# Altium PCB PoBoI.PcbDoc (part 3 of 4)
Units mm, origin at the board's own origin, x right, y up, seen from the top; angles counter-clockwise.
Board outline 90.25 x 95.8 mm, 4 copper layers (Top Layer, GND Layer, PWR Layer, Bottom Layer), stack 1.537 mm thick; 250 components, 177 nets, 942 pads, 25 vias.
Unrouted connection lines stored in the file: 192.
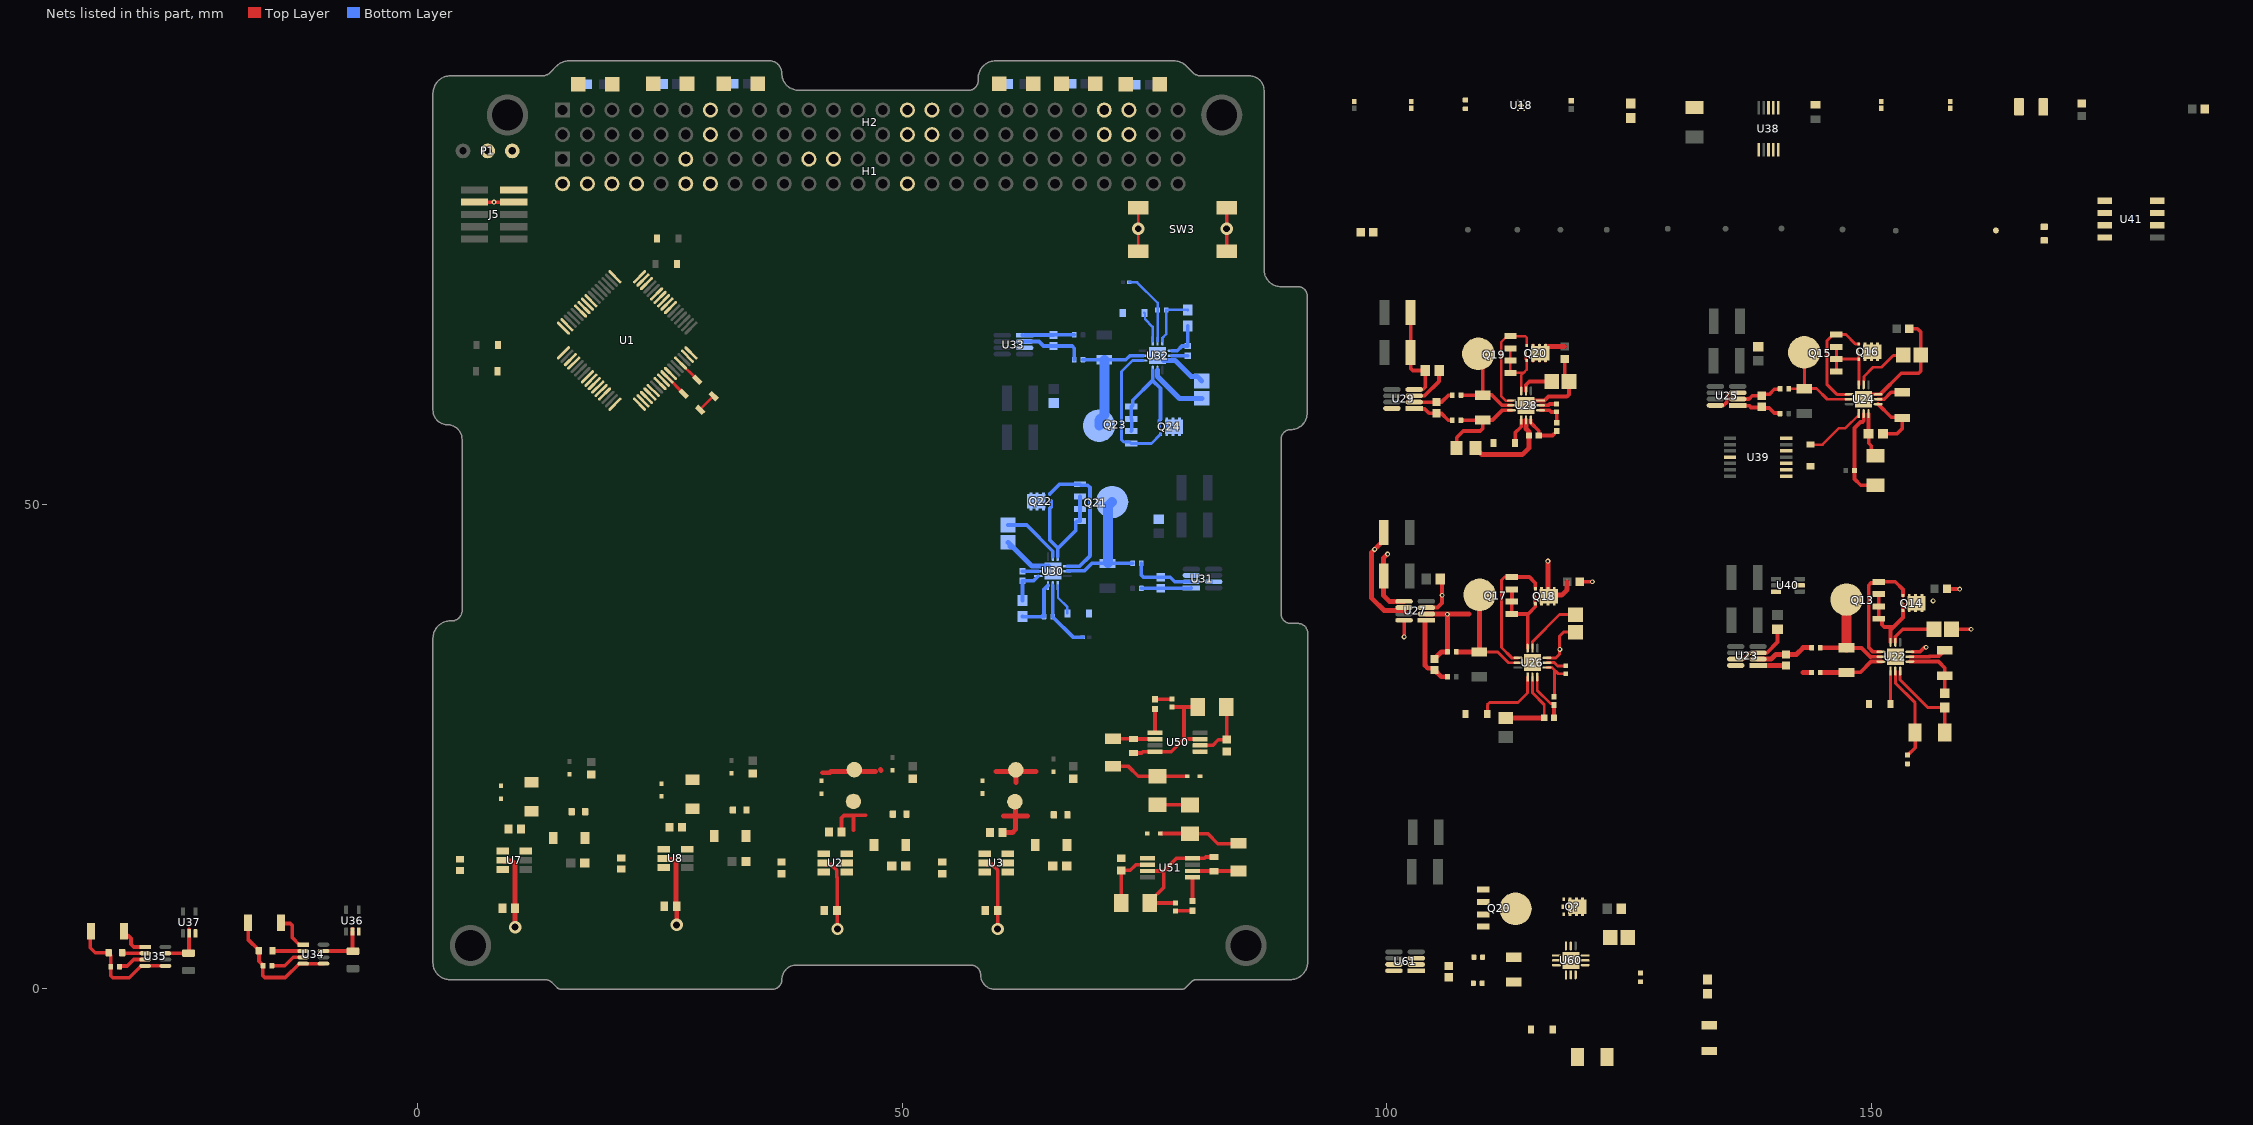
[diagram p4: the nets of this part, all layers, seen from the top]

## Part data (continued)
R81 R91 R152: library part CMP-009-00195-1, "Fixed Resistor, Metal Glaze/thick Film, 0.25W, 7500ohm, 200V, 1% +/-Tol, 100ppm/Cel, Surface Mount, 1206", Case/Package=1206, Max Operating Temperature=155°C, Min Operating Temperature=-55°C, Power=250mW, Tolerance=1%, Mounting Technology="Surface Mount", Pins=2, RoHS Compliant=Yes
R82 R92 R153: library part CMP-009-00194-1, "Fixed Resistor, Thin Film, 0.15W, 80000ohm, 75V, 0.1% +/-Tol, 25ppm/Cel, Surface Mount, 0603", Case/Package=0603, Max Operating Temperature=150°C, Min Operating Temperature=-55°C, Power=150mW, Tolerance=0.1%, Mounting Technology="Surface Mount", Pins=2, RoHS Compliant=Yes
R83 R93 R154: library part CMP-009-00193-1, "Fixed Resistor, Thin Film, 0.25W, 150000ohm, 200V, 1% +/-Tol, 50ppm/Cel, Surface Mount, 1206", Case/Package=1206, Max Operating Temperature=155°C, Min Operating Temperature=-55°C, Power=250mW, Tolerance=1%, Mounting Technology="Surface Mount", Pins=2, RoHS Compliant=Yes
R84 R94 R103 R112 R121 R130 R150: library part CMP-26527-000133-1, "General Purpose Thick Film Chip Resistor, 1206, 25mΩ, 1%, 0.5W", Case Code (Imperial)=1206, Case Code (Metric)=3216, Max Operating Temperature=155°C, Max Power Dissipation=500mW, Min Operating Temperature=-55°C, Resistance=25m, Resistor Type="Thick Film", Temperature Coefficient=100ppm/°C, Tolerance=1%, Case/Package=1206, Construction=Rectangular, Contact Plating=Tin, Depth=1.55mm, Height=0.026inch, Lead Free="Lead Free", Length=0.12inch, Military Standard=Not, Mount="Surface Mount", Number of Terminations=2, Packaging="Tape and Reel", Power Rating=500mW, Radiation Hardening=No, RoHS Compliant=Yes, Series=CSR, Size Code=1206, Width=0.061inch
R85: library part CMP-009-00069-2, "120R 0.1W 5% 0603 (1608 Metric)  SMD", Case/Package=0603, Power=100mW, Tolerance=5%, Mounting Technology=SMT, Pins=2
R86 R87 R95 R96 R104 R105 R113 R114 R122 R123 R131 R132 R155 R156: library part CMP-009-00152-3, "Chip Resistor, 10 Ohms, +/-1 %, 63 mW, -55 to 155 degC, 0402", Case/Package=0402, Max Operating Temperature=155°C, Min Operating Temperature=-55°C, Power=63mW, Tolerance=1%, Pins=2
R88 R89 R97 R98 R106 R107 R115 R116 R124 R125 R133 R134 R157 R158: library part CMP-009-00192-1, "Fixed Resistor, Metal Glaze/thick Film, 0.5W, 3300ohm, 200V, 5% +/-Tol, 200ppm/Cel, Surface Mount, 1210", Case/Package=1210, Max Operating Temperature=155°C, Min Operating Temperature=-55°C, Power=500mW, Tolerance=5%, Mounting Technology="Surface Mount", Pins=2, RoHS Compliant=Yes
R99 R108: library part CMP-009-00197-1, "Fixed Resistor, Metal Glaze/thick Film, 0.125W, 732000ohm, 150V, 1% +/-Tol, 100ppm/Cel, Surface Mount, 0805", Case/Package=0805, Max Operating Temperature=155°C, Min Operating Temperature=-55°C, Power=125mW, Tolerance=1%, Mounting Technology="Surface Mount", Pins=2, RoHS Compliant=Yes
R100 R109: library part CMP-009-00015-5, "Chip Resistor, 10 KOhm, +/- 1%, 0.1 W, -55 to 155 degC, 0402 (1005 Metric)", Case/Package=0402, Max Operating Temperature=155°C, Min Operating Temperature=-55°C, Power=100mW, Tolerance=1%, Voltage Rating=50V, Mounting Technology=SM, Pins=2, RoHS Compliant=True
R101 R110: library part CMP-009-00202-1, "Fixed Resistor, Metal Glaze/thick Film, 0.0625W, 60400ohm, 50V, 1% +/-Tol, 100ppm/Cel, Surface Mount, 0402", Case/Package=0402, Max Operating Temperature=155°C, Min Operating Temperature=-55°C, Power=62.5mW, Tolerance=1%, Mounting Technology="Surface Mount", Pins=2, RoHS Compliant=Yes
R102 R111: library part CMP-009-00204-1, "Fixed Resistor, Metal Glaze/thick Film, 0.2W, 220000ohm, 50V, 5% +/-Tol, 200ppm/Cel, Surface Mount, 0402", Case/Package=0402, Max Operating Temperature=155°C, Min Operating Temperature=-55°C, Power=200mW, Tolerance=5%, Mounting Technology="Surface Mount", Pins=2, RoHS Compliant=Yes
R117 R126: library part CMP-009-00205-1, "Fixed Resistor, Metal Glaze/thick Film, 0.05W, 866000ohm, 25V, 1% +/-Tol, -200,200ppm/Cel, 0201", Case/Package=0201, Max Operating Temperature=125°C, Min Operating Temperature=-55°C, Power=50mW, Tolerance=1%, Pins=2, RoHS Compliant=Yes
R118 R127: library part CMP-009-00089-2, "2K37 0.063W 1% 0402 (1005 Metric)  SMD", Case/Package=0402, Power=63mW, Tolerance=1%, Mounting Technology=SMT, Pins=2
R119 R128: library part CMP-009-00206-1, "Fixed Resistor, Metal Glaze/thick Film, 0.1W, 37400ohm, 75V, 1% +/-Tol, 100ppm/Cel, Surface Mount, 0603", Case/Package=0603, Max Operating Temperature=155°C, Min Operating Temperature=-55°C, Power=100mW, Tolerance=1%, Mounting Technology="Surface Mount", Pins=2, RoHS Compliant=Yes
R120 R129: library part CMP-009-00022-5, "Chip Resistor, 100 KOhm, +/- 1%, 0.1 W, -55 to 155 degC, 0402 (1005 Metric)", Case/Package=0402, Max Operating Temperature=155°C, Min Operating Temperature=-55°C, Power=100mW, Tolerance=1%, Voltage Rating=50V, Mounting Technology=SM, Pins=2, RoHS Compliant=True
R135 R136: library part CMP-009-00076-2, "1K 0.125W 5% 0805 (2012 Metric)  SMD", Case/Package=0805, Power=125mW, Tolerance=5%, Mounting Technology=SMT, Pins=2
R137: library part CMP-009-00025-5, "Chip Resistor, 100 KOhm, +/- 1%, 0.25 W, -55 to 155 degC, 1206 (3216 Metric)", Case/Package=1206, Max Operating Temperature=155°C, Min Operating Temperature=-55°C, Power=250mW, Tolerance=1%, Voltage Rating=200V, Mounting Technology=SM, Pins=2, RoHS Compliant=True
R138: library part CMP-009-00017-5, "Chip Resistor, 10 KOhm, +/- 1%, 01 W, -55 to 155 degC, 0603 (1608 Metric)", Case/Package=0603, Max Operating Temperature=155°C, Min Operating Temperature=-55°C, Power=100mW, Tolerance=1%, Voltage Rating=50V, Mounting Technology=SM, Pins=2, RoHS Compliant=True
Rc Rc1: library part CMP-2002-08403-1, Manufacturer="Vishay Dale", Part Number=CRCW040224K0FKED
RFB1 RFB11: library part CMP-2003-00461-1, Manufacturer=Panasonic, Part Number=ERJ-8ENF64R9V
RFB2 RFB21: library part CMP-2000-00636-2, "RES SMD 7.5K OHM 1% 1/10W 0603", Case Code (Imperial)=0603, Case Code (Metric)=1608, Max Operating Temperature=155°C, Max Power Dissipation=100mW, Min Operating Temperature=-55°C, Package Quantity=1, Resistance=7.5kR, Resistance Tolerance=1%, Resistor Type="Thick Film", Temperature Coefficient=100ppm/°C, Voltage Rating=75V, Voltage Rating (DC)=50V, Case/Package=0603, Construction=Rectangular, Contact Plating=Tin, Depth=0.8mm, Features="Automotive AEC-Q200", Height=0.022inch, Lead Free="Lead Free", Length=1.6mm, Military Standard=Not, Mount="Surface Mount", Number of Terminations=2, Packaging="Tape and Reel", Power Rating=100mW, Radiation Hardening=No, REACH SVHC="No SVHC", RoHS Compliant=Yes, Series=ERJ, Termination=SMD/SMT, Tolerance=1%, Width=0.8mm
RLED1 RLED2: library part CMP-1659-00057-1, "Chip Resistor, 150 Ohm, +/- 1%, 0.1 W, -55 to 155 degC, 0603 (1608 Metric), RoHS, Tape and Reel / RC0603FR-07150RL", Case\Package=Radial, Colour=Green, Forward Voltage="2.2 V", Package Quantity=1000, ComponentLink1Description="Manufacturer URL", ComponentLink1URL=http://www.yageo.com/, ComponentLink2Description=Datasheet, ComponentLink2URL=http://www.yageo.com/documents/recent/PYu-RC_Group_51_RoHS_L_04.pdf, DatasheetVersion="Rev. 4, 02/2016", Height="8.6 mm", Illumination Colour=Green, Lens Style=Clear, Luminous Intensity="200 mcd", Mount="Through Hole", Nominal Vf="2.2 V", PackageDescription="2-Pin Surface Mount Device, Body 1.6 x 0.8 mm", PackageReference=0603, Packaging=Bulk, RoHSCompliant=true, Viewing Angle="20 degrees"
RLED3 RLED4: library part CMP-2000-00001-1, "240 Ohm 0603 / ERA3AEB244V", Manufacturer=Panasonic, Part Number=ERA3AEB244V
RLED5 RLED6: library part CMP-1012-00468-3, "RES Thick Film, 430Ω, 1%, 0.1W, 100ppm/°C, 0603 / CRCW0603430RFKEA", Case Code (Imperial)=0603, Case Code (Metric)=1608, Max Operating Temperature=155°C, Max Power Dissipation=100mW, Min Operating Temperature=-55°C, Package Quantity=10, Resistance=430R, Temperature Coefficient=100ppm/°C, Tolerance=1%, Voltage Rating=75V, Case/Package=0603, Composition="Thick Film", Contact Plating=Tin, Depth=0.85mm, Features="Automotive AEC-Q200", Height=0.45mm, Lead Free="Lead Free", Length=1.55mm, Military Standard=Not, Mount="Surface Mount", Number of Pins=2, Number of Terminations=2, Packaging="Tape and Reel", Power Rating=100mW, Radiation Hardening=No, Termination=SMD/SMT, Voltage Rating (DC)=75V, Weight=7.1E-05oz, Width=0.033inch, Working Voltage=75V
SW1 SW2: library part CMP-011-00000-2, "Tactile Switch, SPST-NO, 0.05 A, 12 V, -25 to 70 degC, 2-Pin SMD, RoHS, Tape and Reel", Case/Package=B3U-1000, Contact Current Rating=50mA, IP Rating=IP40, Manufacturer="Omron Electronic Components", Max Contact Resistance=100mohm, Max Operating Temperature=70°C, Max Voltage Rating (DC)=12V, Min Operating Temperature=-25°C, Operating Force=153gf, Package Description="2-Pin Surface Mount Device, Body 3 x 2.5 mm", Package Quantity=3500, Resistance=0.1Ohm, Contact Material=Silver, Current Rating=50mA, Datasheet URL=http://www.omron.com/ecb/products/pdf/en-b3u.pdf, Datasheet Version=Jan-15, Manufacturer URL=http://www.omron.com/, Max Current Rating=50mA, Mounting Technology=SM, Package Reference=B3U-1000, Packaging=TapeandReel, RoHS Compliant=True, Throw Configuration=SPST, Voltage Rating=12V, Voltage Rating (DC)=12V
SW3: library part CMP-011-00014-3, "Momentary Switch", Rated Current Max="0.01 mA", Rated Current Min="50 mA", Rated Voltage Max="1 V", Rated Voltage Min="12 V", DataSheet=https://www.cuidevices.com/product/resource/ts04.pdf
U1: library part CMP-0237-00201-3, "ARM Cortex-M3 32-bit MCU, 512 KB Flash, 64 KB Internal RAM, 51 I/Os, 64-pin LQFP, -40 to 85 degC, Tray", I/Os (High Current)=51, Operating Frequency(F) (Processor speed) (MHz)=72, Supply Voltage(Vcc) min (V)=2, A/D Converter="3x12-bit (16 Channel)", ComponentLink1Description="Manufacturer URL", ComponentLink1URL=http://www.st.com/web/en/home.html, ComponentLink2Description=Datasheet, ComponentLink2URL=http://www.st.com/st-web-ui/static/active/en/resource/technical/document/datasheet/CD00191185.pdf, ComponentLink3Description="Package Specification", ComponentLink3URL=http://www.st.com/st-web-ui/static/active/en/resource/technical/document/datasheet/DM00037051.pdf, Core="ARM Cortex-M3", D/A Converter="2x12-bit (2 Channel)", DatasheetVersion="Rev. 8", FLASH Size (Prog) (kB)=512, Internal RAM Size (kB)=64, Mounting Technology="Surface Mount", PackageDescription="64-Pin Low Profile Quad Flat Package, 10 x 10 mm Body, 0.5 mm Pitch", PackageReference=LQFP64, PackageVersion="Rev. 4, 06/2013", Packing=Tray, PartNumber=STM32F103RET6
U2 U3 U7 U8: library part CMP-0491-01627-1, "600 mA, 1.4 MHz Step-Down Switching Regulator, 6-pin SOT23 (S6-6), -40 to 85 degC, Pb-Free, Mini Tape and Reel", Manufacturer="Linear Technology", ComponentLink1Description="Manufacturer URL", ComponentLink1URL=http://www.linear.com/, ComponentLink2Description=Datasheet, ComponentLink2URL=http://cds.linear.com/docs/en/datasheet/lt1616fs.pdf, ComponentLink3Description="Package Specification", ComponentLink3URL=http://cds.linear.com/docs/en/datasheet/175435f.pdf, Mounting Technology="Surface Mount", Number of Outputs=1, PackageDescription="6-Pin Plastic SOT-23, Body 1.625 x 2.9 mm, Pitch 0.95 mm", PackageReference=S6-6, PackageVersion=Aug-07, Packing="Mini Tape and Reel", PartNumber=LT1616ES6#TRMPBF, RoHS=TRUE
U18: library part CMP-019-00040-3, "Ultra-Low-Noise, Low-IQ LDO, 3.3 V, 0.25 A, -40 to 125 degC, 4-Pin X2SON, RoHS, Tape and Reel", Max Operating Temperature=125°C, Min Operating Temperature=-40°C, Output Voltage=3.3V, Pins=5
U22 U24 U26 U28 U30 U32 U60: library part CMP-019-00049-1, "Switching Controller, CMOS, PQCC12", Case/Package=HVQCCN, Max Operating Temperature=85°C, Max Supply Voltage=36V, Min Operating Temperature=-40°C, Pins=12, RoHS Compliant=Yes
U23 U25 U27 U29 U31 U33 U61: library part CMP-010-00025-1, "Power Supply Support Circuit, Fixed, 2 Channel, 2V, PDSO8", Case/Package=LSSOP, Max Operating Temperature=125°C, Max Supply Voltage=5.5V, Min Operating Temperature=-40°C, Min Supply Voltage=3V, Nominal Supply Voltage=3.3V, Pins=8, RoHS Compliant=Yes
U34 U35: library part CMP-00023-00003-1, "Power Supply Management Circuit, Adjustable, 1 Channel, BICMOS, PDSO8", Case/Package=LSSOP, Max Operating Temperature=125°C, Min Operating Temperature=-40°C, Pins=8, RoHS Compliant=Yes
U36 U37: library part CMP-016-00011-1, "AND Gate, AUP/ULP/V Series, 1-Func, 2-Input, CMOS, PDSO5", Case/Package=TSSOP, Max Operating Temperature=125°C, Max Supply Voltage=3.6V, Min Operating Temperature=-40°C, Min Supply Voltage=800mV, Nominal Supply Voltage=3.3V, Logic Type="AND GATE", Pins=5, RoHS Compliant=Yes
U38: library part CMP-015-00009-7, "Interface Circuit, PDSO10", Case/Package=TSSOP, Max Operating Temperature=70°C, Max Supply Voltage=5.5V, Min Operating Temperature=0°C, Min Supply Voltage=2.7V, Nominal Supply Voltage=3.3V, Pins=10, RoHS Compliant=Yes
U39: library part CMP-016-00013-1, "Inverter, AC Series, 6-Func, 1-Input, CMOS, PDSO14", Case/Package=TSSOP, Max Operating Temperature=85°C, Max Supply Voltage=6V, Min Operating Temperature=-40°C, Min Supply Voltage=2V, Nominal Supply Voltage=3.3V, Logic Type=INVERTER, Pins=14, RoHS Compliant=Yes
U40: library part CMP-019-00050-1, "Bus Driver, LVC/LCX/Z Series, 1-Func, 1-Bit, True Output, CMOS, PDSO6", Case/Package=TSSOP, Max Operating Temperature=125°C, Max Supply Voltage=5.5V, Min Operating Temperature=-40°C, Min Supply Voltage=1.65V, Pins=6, RoHS Compliant=Yes
U41: library part CMP-015-00010-2, "Line Transceiver, 1 Func, 1 Driver, 1 Rcvr, BICMOS, PDSO10", Case/Package=HVSON, Max Operating Temperature=85°C, Max Supply Voltage=5.25V, Min Operating Temperature=-40°C, Min Supply Voltage=4.75V, Nominal Supply Voltage=5V, Pins=10, RoHS Compliant=Yes
U50 U51: library part CMP-0069-01733-3, "600kHz/1.3MHz Step-up PWM DC/DC Converter, 8-pin MSOP, Pb-Free", Manufacturer="Texas Instruments", PackageTopMarking=ZXTT*S18B, PowerWise=N, Code_JEDEC=MO-187-AA, ComponentLink1Description="Datasheet URL", ComponentLink1URL=http://www.ti.com/general/docs/lit/getliterature.tsp?genericPartNumber=LM2622&fileType=pdf, CompType=Switcher, PackageDescription="MINI SOIC, .118 x .118 x .034in, 8 Lead, .0256in Pitch", PackageReference=DGK0008A, PinCount=8, RoHS=Y
Y1: library part CMP-003-00029-1, "Crystal 32.768kHz 10ppm 7pF -40C +85C", Frequency=32.768kHz, Pins=2

## Free pads (board coordinates)
  round 4.25 hole 3.18: 3(5.477,4.47) 3(9.28,90.17) 3(82.982,90.17) 3(85.481,4.47)

## Via types
v1: diameter 0.508, hole 0.254, Top Layer to Bottom Layer, 16 vias
v2: diameter 1.27, hole 0.711, Top Layer to Bottom Layer, 6 vias
v3: diameter 0.4, hole 0.18, Top Layer to Bottom Layer, 3 vias

## Nets (pads, with @x,y where several pads share a name; then routed paths per layer and width w, separated by ;. In a path a pad name is that pad's centre, name@x,y a point inside that pad or via, vN(x,y) a via of type N, cw(c..) or ccw(c..) an arc to the next point about the centre after c; other vN are vias at no path point)
3V3: C88.1 R108.1 R112.1 R113.1 R115.1 R116.1 U28.12 U29.4 | length 21
  Top Layer w0.381: R116.1@102.473,69.799 R115.1@102.473,65.659 102.473,64.028 102.696,63.805 C88.1@103.974,63.805 103.974,62.088 103.751,61.865 102.866,61.865 U29.4@102.845,61.843 ; R108.1@107.202,55.804 107.242,55.844 107.242,56.883 107.915,57.556 109.652,57.556 109.931,57.836 R112.1@109.931,58.693 110.915,58.693 111.912,59.691 U28.12@112.894,59.691 ; R113.1@107.663,58.674 107.673,58.684 R112.1@109.922,58.684
3V3_1: C24.2 D5.2 D54.2 L3.2 R28.2
3V3_2: C29.2 D7.2 D55.2 L4.2 R34.2
3V3_EnableP: D58.1 U26.1 | length 7.3
  Top Layer w0.3: D58.1@110.386,28.372 110.386,29.314 110.612,29.54 113.563,29.54 114.545,30.521 U26.1@114.545,32.173
3V3_EnablePWD: U39.2
3V3_EnableS: D59.1 U28.1 | length 2.6
  Top Layer w0.381: D59.1@113.256,56.337 113.256,57.376 113.884,58.004 U28.1@113.884,58.715
3V3_LDO: C76.1 U1.1 U1.13 U1.19 U1.32 U1.48 U1.64 U18.1
3V3_Primary: Q18.1 Q18.2 Q18.3 Q18.6 Q18.7 Q18.8 Q18.10 | length 5.8
  Top Layer w0.508: Q18.2@116.637,41.38 v1(116.637,44.145) ; Q18.10@116.731,40.53 116.823,40.621 118.066,40.621 118.628,41.184 118.628,42.012
3V3_Secondary: Q20.1@116.409,66.458 Q20.2@115.759,66.458 Q20.3@115.109,66.458 Q20.6 Q20.7 Q20.8 Q20.10 | length 8.2
  Top Layer w0.305: Q20.6@115.109,64.758 115.109,65.011 Q20.10@115.707,65.608 ; Q20.3@115.109,66.458 115.109,66.206 Q20.10@115.707,65.608 ; Q20.7@115.759,64.758 115.759,65.518 Q20.10@115.849,65.608 ; Q20.2@115.759,66.458 115.759,65.698 Q20.10@115.849,65.608 ; Q20.8@116.409,64.758 116.409,65.048 Q20.10@115.849,65.608 ; Q20.1@116.409,66.366 Q20.1@116.409,66.458 ; Q20.10@115.707,65.608 Q20.10@115.849,65.608
  Top Layer w0.5: Q20.10@115.849,65.608 Q20.10@116.508,66.267 ; Q20.1@116.409,66.366 Q20.10@116.508,66.267 ; 118.363,66.285 118.345,66.267 Q20.10@116.508,66.267
3V3_stmDisableP: U1.16 U39.1
3V3_stmDisableS: U1.17 U39.3
5V: R80.1 R84.1 R86.1 U22.12 | length 6.8
  Top Layer w0.4: R84.1@147.447,32.658 148.881,32.671 149.97,33.78 150.994,33.79 U22.12@151.045,33.79
  Top Layer w0.5: R86.1@144.753,32.658 R84.1@147.447,32.658
5V_1: C8.2 D1.2 D52.2 L1.2 R9.2 | length 5.8
  Top Layer w0.508: 41.808,22.301 42.545,22.301 42.672,22.428 44.888,22.428 L1.2@45.081,22.621 45.274,22.428 47.286,22.428 ; 47.763,22.621 47.828,22.556
5V_2: C12.2 D3.2 D53.2 L2.2 R12.2 | length 5.5
  Top Layer w0.508: 59.665,22.428 63.83,22.428 ; 61.743,21.315 L2.2@61.743,22.596 L2.2@61.747,22.592
5V_EnableP: D56.1 U22.1 | length 3.4
  Top Layer w0.3: D56.1@151.991,29.413 U22.1@151.991,32.782
5V_EnablePWD: D63.1 D64.1 | length 2
  Top Layer w0.3: D63.1@29.159,59.741 29.159,59.773 D64.1@30.556,61.17
5V_EnableS: D57.1 U24.1 | length 6.4
  Top Layer w0.254: D57.1@143.739,56.157 144.981,56.157 146.685,57.861 147.345,57.861 148.717,59.233 U24.1@148.717,59.351
5V_Primary: Q14.1 Q14.2 Q14.3 Q14.6 Q14.7 Q14.8 Q14.10
  other v1: 156.388,40.03
5V_Secondary: Q16.1 Q16.2 Q16.3 Q16.6 Q16.7 Q16.8 Q16.10
5V_stmDisableS: U1.21 U39.5
5V_stmEnableP1: D63.2 U1.25 | length 2.5
  Top Layer w0.3: U1.25@25.742,63.156 27.481,61.417 D63.2@27.483,61.417
5V_stmEnableP2: D64.2 U1.29 | length 2.5
  Top Layer w0.3: U1.29@27.156,64.57 D64.2@28.88,62.846 D64.2@28.88,62.814
12V: R150.1 R151.1 R155.1 U60.12
12V_EnableP: D?.1 U60.1
12V_Primary: Q?.1 Q?.2 Q?.3 Q?.6 Q?.7 Q?.8 Q?.10
B.5: H1.30
B.5_VD: R40.2 R41.1 U1.26
BOOST2_1: C5.1 D1.1 U2.1
BOOST2_2: C10.1 D3.1 U3.1
BOOST_1: C21.1 D5.1 U7.1
BOOST_2: C26.1 D7.1 U8.1
Boot0: H1.8 P1.2
BWE0: H1.14
C\E\m\p\p\t\: U1.24
FB2_1: R9.1 R11.2 U2.3
FB2_2: R12.1 R26.2 U3.3
FB_1: R28.1 R29.2 U7.3
FB_2: R34.1 R44.2 U8.3
GND: C1.2 C2.2 C3.2 C4.2 C6.2 C7.2 C8.1 C11.2 C12.1 C19.2 C23.2 C24.1 C25.2 C27.2 C28.2 C29.1 C75.2 C76.2 C77.2 C79.2 C80.2 C82.2 C83.2 C85.2 C86.2 C88.2 C89.2 C91.2 C92.2 C94.2 C95.1 C96.2 C97.1 C98.2 C99.2 C100.2 C101.2 C102.2 C103.2 C104.2 C121.2 C122.2 Cc1.2 Cc.2 Cin1.2 Cin.2 Cout1.2 Cout.2 D2.2 D4.2 D6.2 D8.2 D38.2 D41.2 D47.2 D50.2 D56.2 D57.2 D58.2 D59.2 D60.2 D61.2 D?.2 GND.1 H2.13 H2.14 H2.29 H2.30 H2.31 H2.32 H2.47 H2.48 J5.3 J5.4 LED1.1 LED2.1 LED3.1 LED4.1 LED5.1 LED6.1 P1.1 R11.1 R26.1 R29.1 R41.2 R44.1 RFB2.2 RFB21.2 SW1.1 SW2.1 SW3.1 SW3.2 U1.12 U1.18 U1.31 U1.47 U1.63 U2.2 U3.2 U7.2 U8.2 U18.2 U18.5 U22.6 U22.13 U23.3 U23.7 U23.8 U24.6 U24.13 U25.3 U25.8 U26.6 U26.13 U27.3 U27.8 U28.6 U28.13 U29.3 U29.8 U30.6 U30.13 U31.3 U31.7 U32.6 U32.13 U33.3 U34.4 U34.5 U35.4 U35.5 U36.3 U37.3 U38.4 U38.5 U39.7 U40.2 U40.6 U41.6 U50.4 U50.7 U51.4 U51.7 U60.6 U60.13 U61.3 U61.7 U61.8 | length 159.4
  Top Layer w0.3: U26.6@116.535,34.163 117.475,34.163 117.856,34.544 117.856,36.398 118.276,36.818 C83.2@119.482,36.818
  Top Layer w0.381: SW2.1@-33.655,6.354 -33.702,6.401 -33.757,6.346 -33.757,4.242 -33.249,3.734 C98.2@-31.866,3.734 ; C98.2@-31.866,3.684 -31.641,3.459 C97.1@-31.641,2.286 -31.641,1.366 -31.418,1.143 -29.731,1.143 -28.497,2.378 U35.4@-28.101,2.378 U35.5@-26.001,2.378 ; SW1.1@-17.473,6.807 -17.473,5.1 -16.361,3.987 C96.2@-16.361,3.937 -16.358,3.934 -16.358,2.852 -15.919,2.413 -15.951,2.38 -15.951,1.392 -15.728,1.168 -13.628,1.168 -12.19,2.606 U34.4@-11.795,2.606 U34.5@-9.694,2.606 ; J5.3@5.864,81.175 J5.4@9.934,81.175 ; U2.2@41.904,13.005 42.063,12.845 42.67,12.845 43.26,12.255 43.26,11.542 43.301,11.501 43.301,8.097 R11.1@43.282,8.077 43.307,8.052 43.307,6.198 v2(43.332,6.172) ; U3.2@58.515,13.005 58.675,12.845 59.282,12.845 59.872,12.255 59.872,8.088 R26.1@59.883,8.077 59.875,8.07 59.875,6.18 v2(59.868,6.172) ; RFB2.2@73.889,24.345 74.738,24.345 74.869,24.476 U50.4@76.11,24.476 77.77,24.476 79.07,25.776 U50.7@80.76,25.776 ; U51.7@75.323,12.172 77.018,12.172 ; Cout.2@76.352,18.996 79.712,18.996 Cout1.2@79.731,18.977 ; Cc.2@77.876,29.115 77.908,29.083 79.096,29.083 ; Cc1.2@78.207,8.833 78.175,8.865 Cin1.2@75.565,8.865 75.565,9.041 77.018,10.494 77.018,12.172 ; 79.096,25.776 79.096,29.083 ; Cin.2@80.515,29.083 79.096,29.083 ; RFB21.2@82.194,13.603 81.37,13.603 81.239,13.472 U51.4@79.973,13.472 78.318,13.472 77.018,12.172 ; SW3.1@83.493,76.109 SW3.2@83.493,80.609 ; U29.8@100.544,59.893 U29.8@100.552,59.902 ; v1(101.803,36.322) 101.803,38.014 U27.8@101.829,38.039 ; U29.3@102.836,61.184 U29.3@102.845,61.193 102.853,61.202 103.914,61.202 105.395,62.683 105.395,63.776 C88.2@105.424,63.805 ; U27.3@104.097,39.339 104.796,39.339 104.804,39.348 105.255,39.348 105.715,39.808 105.715,41.949 C85.2@105.525,42.139 ; U28.13@114.384,60.206 114.884,60.706 116.279,60.706 116.688,61.114 118.596,61.114 118.819,61.337 C86.2@118.819,62.662 118.845,62.662 118.364,63.143 C100.2@118.364,64.984 ; C2.2@119.928,42.012 v1(121.234,42.012) ; U25.8@133.919,60.208 133.928,60.217 134.792,60.217 135.077,60.503 135.077,61.112 135.484,61.519 U25.3@136.22,61.519 ; U23.7@136.017,34.026 136.026,34.034 136.858,34.034 137.49,34.667 138.309,34.667 U23.3@138.318,34.676 138.327,34.684 139.239,34.684 140.335,35.781 C79.2@140.335,37.121 ; U24.13@149.217,60.841 149.717,61.341 U24.6@150.708,61.341 150.913,61.341 153.098,63.525 154.893,63.525 155.116,63.749 155.116,67.769 154.762,68.123 C101.2@153.929,68.123 ; U22.6@154.25,34.773 155.012,34.773 155.469,35.23 155.642,35.23 v1(155.667,35.254) ; C3.2@157.825,41.275 157.838,41.262 159.118,41.262 v1(159.131,41.25) ; C77.2@158.242,37.109 v1(160.299,37.109)
  Top Layer w0.508: U7.2@8.788,13.274 8.884,13.178 9.776,13.178 10.073,12.88 R29.1@10.073,8.331 10.079,8.326 10.079,6.381 v2(10.084,6.375) ; U8.2@25.445,13.437 25.515,13.366 26.398,13.366 26.695,13.068 26.695,8.626 R44.1@26.787,8.534 ; v2(26.746,6.604) 26.754,6.611 26.754,8.527 R44.1@26.761,8.534
  Bottom Layer w0.508: C89.2@60.935,46.064 60.96,46.064 63.387,43.637 U30.13@65.126,43.637 ; C89.2@61.138,45.632 C89.2@61.164,45.632 ; U32.13@76.987,64.837 78.186,64.837 79.815,63.207 80.441,63.207 C92.2@80.924,62.724
  other v1: 117.881,35.027 105.715,40.615 7.899,81.175
  other v2: 83.49,78.435
  other v3: 137.211,34.366
I2CFault: U1.43 U38.7
NetC77_1: C77.1 U22.8 | length 4.9
  Top Layer w0.381: U22.8@152.484,35.763 152.484,36.336 153.258,37.109 C77.1@156.478,37.109
NetC78_1: C78.1 R87.2 U23.2 | length 6
  Top Layer w0.508: U23.2@138.318,34.026 139.664,34.026 140.148,34.51 C78.1@141.202,34.51 142.282,34.51 142.977,35.204 R87.2@143.847,35.204
NetC78_2: C78.2 R86.2 U23.1 | length 3.8
  Top Layer w0.508: U23.1@138.318,33.36 C78.2@141.202,33.36 ; 142.977,32.639 R86.2@143.847,32.639
NetC80_1: C80.1 U24.8 | length 5.4
  Top Layer w0.305: U24.8@149.24,62.763 149.24,63.185 150.194,64.139 151.058,64.139 152.283,65.365 153.274,65.365 C80.1@153.314,65.405
NetC81_1: C81.1 R96.2 U25.2 | length 4.8
  Top Layer w0.381: U25.2@136.22,60.858 136.229,60.867 137.375,60.867 137.713,61.205 C81.1@138.709,61.205 ; C81.1@138.709,61.23 138.819,61.34 139.47,61.34 139.996,61.866 140.537,61.866 R96.2@140.596,61.925
NetC81_2: C81.2 R95.2 U25.1 | length 4.8
  Top Layer w0.381: U25.1@136.246,60.183 137.404,60.183 137.592,59.995 138.649,59.995 C81.2@138.709,60.055 ; C81.2@138.633,59.969 138.67,59.933 139.483,59.933 139.991,59.424 140.53,59.424 140.589,59.364 R95.2@140.589,59.36
NetC83_1: C83.1 U26.8 | length 6.3
  Top Layer w0.3: U26.8@115.045,35.154 115.07,35.179 115.07,35.841 117.849,38.62 C83.1@119.482,38.62
NetC84_1: C84.1 R105.2 U27.2 | length 7.7
  Top Layer w0.5: U27.2@104.097,38.689 v1@106.299,38.689 ; C84.1@104.941,34.052 105.661,34.773 R105.2@106.281,34.773 v1@106.281,38.677
  other v1: 106.274,38.659
NetC84_2: C84.2 R104.2 U27.1 | length 7.5
  Top Layer w0.5: U27.1@103.962,38.024 103.962,33.376 104.261,33.077 104.766,33.077 C84.2@104.941,32.902 105.636,32.207 R104.2@106.281,32.207
NetC86_1: C86.1 U28.8 | length 3.4
  Top Layer w0.381: U28.8@114.384,61.696 114.384,62.34 114.706,62.662 C86.1@117.018,62.662
NetC87_1: C87.1 R114.2 U29.2 | length 4.2
  Top Layer w0.381: U29.2@102.845,60.528 U29.2@102.853,60.537 ; U29.2@102.845,60.543 C87.1@105.156,60.544 ; C87.1@105.156,60.544 105.655,60.544 106.375,61.265 R114.2@106.763,61.265
NetC87_2: C87.2 R113.2 U29.1 | length 4.4
  Top Layer w0.381: U29.1@102.845,59.893 102.902,59.836 103.943,59.836 104.383,59.397 105.154,59.397 C87.2@105.156,59.394 ; C87.2@105.156,59.36 105.664,59.36 106.35,58.674 R113.2@106.763,58.674
NetC89_1: C89.1 U30.8 | length 6.3
  Bottom Layer w0.381: C89.1@60.935,47.865 62.859,47.865 65.557,45.167 U30.8@65.557,44.594
NetC90_1: C90.1 R123.2 U31.2 | length 6.7
  Bottom Layer w0.381: R123.2@74.687,43.917 74.687,42.707 74.91,42.484 77.679,42.484 78.147,42.017 U31.2@79.85,42.017
NetC90_2: C90.2 R122.2 U31.1 | length 5.2
  Bottom Layer w0.381: R122.2@74.694,41.326 74.699,41.33 76.678,41.33 C90.2@76.683,41.335 76.699,41.351 79.834,41.351 U31.1@79.85,41.367
NetC92_1: C92.1 U32.8 | length 6.2
  Bottom Layer w0.508: U32.8@76.36,63.846 76.36,63.184 78.622,60.923 ; 78.672,60.923 C92.1@80.975,60.923
NetC93_1: C93.1 R132.2 U33.2 | length 6.6
  Bottom Layer w0.381: U33.2@62.644,66.797 64.132,66.797 64.6,66.329 C93.1@65.634,66.329 67.544,66.329 67.767,66.105 R132.2@67.767,64.941
NetC93_2: C93.2 R131.2 U33.1 | length 5.2
  Bottom Layer w0.381: U33.1@62.39,67.447 U33.1@62.406,67.463 ; U33.1@62.644,67.447 62.66,67.463 65.618,67.463 C93.2@65.634,67.479 65.638,67.483 67.77,67.483 R131.2@67.774,67.488
NetC95_2: C95.2 U34.3 | length 3.6
  Top Layer w0.381: C95.2@-15.019,2.388 -13.691,2.388 -12.822,3.256 U34.3@-11.795,3.256
NetC96_1: C96.1 U34.2 | length 3.2
  Top Layer w0.381: C96.1@-14.961,3.937 -14.937,3.913 -11.801,3.913 U34.2@-11.795,3.906
NetC97_2: C97.2 U35.3 | length 3.1
  Top Layer w0.381: C97.2@-30.657,2.201 -30.682,2.201 -30.682,2.227 C97.2@-30.741,2.286 -30.741,2.311 -30.682,2.371 -29.933,2.371 -29.276,3.028 U35.3@-28.101,3.028 U35.3@-28.108,3.021
NetC98_1: C98.1 U35.2 | length 2.4
  Top Layer w0.381: C98.1@-30.466,3.734 -30.416,3.684 -28.108,3.684 U35.2@-28.101,3.678 U35.2@-28.108,3.671
NetC99_1: C99.1 R137.2 U38.1
NetC120_1: C120.1 R156.2 U61.2
NetC120_2: C120.2 R155.2 U61.1
NetC122_1: C122.1 U60.8
NetCc1_1: Cc1.1 Rc1.2 | length 1.8
  Top Layer w0.381: Cc1.1@78.207,8.058 Rc1.2@79.959,8.06
NetCc_1: Cc.1 Rc.2 | length 1.8
  Top Layer w0.381: Rc.2@76.098,29.888 Cc.1@77.876,29.889
NetCin1_1: Cin1.1 L12.1 U51.6 | length 6.3
  Top Layer w0.381: Cin1.1@72.612,8.865 72.619,8.871 L12.1@72.619,12.226 72.634,12.242 73.557,12.242 74.137,12.822 U51.6@75.323,12.822
NetCin_1: Cin.1 L11.1 U50.6 | length 6.3
  Top Layer w0.381: U50.6@80.76,25.126 82.047,25.126 82.628,25.706 83.449,25.706 L11.1@83.49,25.747 ; Cin.1@83.49,29.061 83.49,25.823 L11.1@83.566,25.747
NetCout1_1: Cout1.1 D12.1 RFB11.2 | length 8.5
  Top Layer w0.381: D12.1@76.631,16.027 79.727,16.027 Cout1.1@79.731,16.024 81.537,16.024 82.575,14.986 84.706,14.986 RFB11.2@84.734,15.014
NetCout_1: Cout.1 D11.1 RFB1.2 | length 8.2
  Top Layer w0.381: RFB1.2@71.78,22.959 73.358,22.959 74.368,21.949 Cout.1@76.352,21.949 ; Cout.1@76.179,21.946 D11.1@79.426,21.946
NetD11_2: D11.2 L11.2 U50.5 | length 0.1
  Top Layer w0.381: D11.2@80.746,21.946 D11.2@80.772,21.946 ; U50.5@80.746,24.462 U50.5@80.779,24.495
NetD12_2: D12.2 L12.2 U51.5 | length 0
  Top Layer w0.381: L12.2@72.619,13.478 L12.2@72.622,13.475 ; U51.5@75.311,13.483 U51.5@75.323,13.472 U51.5@75.319,13.475
NetH2_45: H2.45 H2.46
NetLED1_2: LED1.2 RLED1.1
NetLED2_2: LED2.2 RLED2.1
NetLED3_2: LED3.2 RLED3.1
NetLED4_2: LED4.2 RLED4.1
NetLED5_2: LED5.2 RLED5.1
NetLED6_2: LED6.2 RLED6.1
NetQ13_1: Q13.1 Q13.2 Q13.3 Q14.5 Q14.9 U22.9 | length 9.4
  Top Layer w0.381: Q13.3@150.764,40.734 Q13.2@150.764,39.464 Q13.1@150.764,38.194 151.003,38.194 151.117,38.08 151.117,37.561 151.34,37.338 152.298,37.338 ; U22.9@151.984,35.763 151.984,37.024 152.298,37.338 ; Q14.9@153.155,39.814 Q14.9@153.149,39.814 153.286,39.677 153.286,39.05 Q14.5@153.274,39.039 153.274,38.314 152.298,37.338
NetQ13_4: Q13.4 Q14.4 U22.10 | length 12.5
  Top Layer w0.381: U22.10@150.994,34.773 150.19,34.773 149.735,35.227 149.735,41.658 149.967,41.89 150.65,41.89 Q13.4@150.764,42.004 152.483,42.004 153.274,41.214 Q14.4@153.274,40.589
NetQ13_5-6-7-8: Q13.5-6-7-8 R84.2 R87.1 U22.11 | length 11.6
  Top Layer w0.4: R87.1@144.747,35.204 R87.1@144.75,35.208 ; R84.2@147.444,35.208 R84.2@147.447,35.211 148.051,35.174 148.837,35.181 cw(c148.838,34.781) 148.838,35.181 148.987,35.181 149.052,35.119 149.924,34.263 U22.11@150.994,34.273
  Top Layer w0.5: R87.1@144.75,35.208 R84.2@147.444,35.208
  Top Layer w1: R84.2@147.452,35.211 Q13.5-6-7-8@147.452,40.168
NetQ15_1: Q15.1 Q15.2 Q15.3 Q16.5 Q16.9 U24.9 | length 8.3
  Top Layer w0.305: Q15.1@146.406,63.703 Q15.2@146.406,64.973 ; Q15.3@146.406,66.243 Q15.2@146.406,64.973 ; Q16.9@148.59,65.761 148.59,65.69 148.715,65.565 Q16.5@148.715,64.986 148.715,64.976 148.713,64.973 Q15.2@146.406,64.973 ; U24.9@148.717,62.332 Q16.5@148.717,64.942
NetQ15_4: Q15.4 Q16.4 U24.10 | length 11.2
  Top Layer w0.305: U24.10@147.727,61.349 146.448,61.349 145.415,62.382 145.415,66.853 146.075,67.513 147.396,67.513 148.362,66.548 148.713,66.548 148.715,66.545 Q16.4@148.715,66.536
NetQ15_5-6-7-8: Q15.5-6-7-8 R94.2 R96.1 U24.11 | length 10.4
  Top Layer w0.305: R96.1@141.496,61.925 R94.2@143.077,61.925 ; Q15.5-6-7-8@143.093,65.677 143.093,61.942 144.357,61.942 145.458,60.841 U24.11@147.727,60.841
NetQ17_1: Q17.1 Q17.2 Q17.3 Q18.5 Q18.9 U26.9 | length 9.9
  Top Layer w0.381: Q17.2@112.908,39.954 Q17.1@112.908,38.684 114.545,38.684 ; Q17.2@112.928,39.975 Q17.3@112.928,41.204 ; U26.9@114.545,35.154 114.545,38.684 ; Q18.9@115.216,40.525 Q18.9@115.216,40.525 115.277,40.466 115.277,39.81 Q18.5@115.337,39.75 ; Q18.5@115.341,39.75 115.341,39.421 114.605,38.684 114.545,38.684
NetQ17_4: Q17.4 Q18.4 U26.10 | length 13.6
  Top Layer w0.3: Q17.4@112.908,42.494 112.166,42.494 111.836,42.164 111.836,35.23 112.903,34.163 U26.10@113.554,34.163
  Top Layer w0.381: Q17.4@112.908,42.494 114.727,42.494 115.337,41.885 Q18.4@115.337,41.305
NetQ17_5-6-7-8: Q17.5-6-7-8 R103.2 R105.1 U26.11 | length 14.9
  Top Layer w0.3: R103.2@109.576,34.753 111.474,34.753 112.573,33.655 U26.11@113.554,33.655
  Top Layer w0.5: 106.281,38.689 108.483,38.689 ; R105.1@107.181,34.773 107.181,34.763 109.566,34.763 R103.2@109.576,34.753 Q17.5-6-7-8@109.576,40.638
NetQ19_1: Q19.1 Q19.2 Q19.3 Q20.5 Q20.9 U28.9 | length 8.1
  Top Layer w0.254: Q19.3@112.776,66.091 112.776,64.833 112.782,64.827 Q19.2@112.776,64.821 Q19.1@112.776,63.551 114.105,63.551 ; U28.9@113.894,61.671 113.894,63.339 114.105,63.551 ; Q20.9@114.334,65.608 114.334,64.983 114.459,64.858 Q20.5@114.459,64.833 114.459,63.905 114.105,63.551
NetQ19_4: Q19.4 Q20.4@114.459,66.383 U28.10 | length 10.6
  Top Layer w0.254: U28.10@112.894,60.706 112.268,60.706 111.811,61.163 111.811,66.726 112.446,67.361 Q19.4@112.776,67.361 112.808,67.328 114.311,67.328 114.459,67.18 Q20.4@114.459,66.383
NetQ19_5-6-7-8: Q19.5-6-7-8 R112.2 R114.1 U28.11 | length 10.2
  Top Layer w0.381: R114.1@107.663,61.265 107.673,61.255 109.922,61.255 R112.2@109.931,61.246 ; Q19.5-6-7-8@109.464,65.525 109.931,65.057 R112.2@109.931,61.246 ; U28.11@112.894,60.206 111.93,60.206 110.846,61.29 109.976,61.29 R112.2@109.931,61.246
NetQ20_1: Q20.1@109.982,10.236 Q20.2@109.982,8.966 Q20.3@109.982,7.696 Q?.5 Q?.9 U60.9
NetQ20_4: Q20.4@109.982,6.426 Q?.4 U60.10
NetQ20_5-6-7-8: Q20.5-6-7-8 R150.2 R156.1 U60.11
NetQ21_1: Q21.1 Q21.2 Q21.3 Q22.5 Q22.9 U30.9 | length 12.6
  Bottom Layer w0.381: Q22.5@65.237,49.517 65.237,46.313 66.057,45.493 ; Q22.5@65.237,49.568 65.362,49.693 Q22.9@65.362,50.292 Q22.9@65.362,50.343 ; U30.9@66.057,44.594 66.057,45.493 ; Q21.3@68.351,50.8 Q21.2@68.351,49.53 Q21.1@68.351,48.26 68.021,48.26 67.907,48.146 67.907,47.282 66.118,45.493 66.057,45.493
NetQ21_4: Q21.4 Q22.4 U30.10 | length 14.6
  Bottom Layer w0.381: Q22.4@65.237,51.067 66.24,52.07 Q21.4@68.351,52.07 68.466,51.956 69.17,51.956 69.393,51.733 69.393,44.679 68.318,43.604 U30.10@67.048,43.604
NetQ21_5-6-7-8: Q21.5-6-7-8 R121.2 R123.1 U30.11 | length 13.5
  Bottom Layer w0.381: U30.11@67.048,43.129 68.809,43.129 69.596,43.917 R121.2@71.177,43.917 ; R121.2@71.196,43.897 71.206,43.907 71.664,43.907 73.777,43.907 R123.1@73.787,43.917
  Bottom Layer w1: R121.2@71.247,43.948 71.247,49.817 Q21.5-6-7-8@71.664,50.234
NetQ23_1: Q23.1 Q23.2 Q23.3 Q24.5 Q24.9 U32.9 | length 12.3
  Bottom Layer w0.381: Q23.3@73.645,57.549 73.685,57.59 73.685,58.779 Q23.2@73.645,58.819 Q23.1@73.645,60.089 73.684,60.089 73.798,60.204 73.798,60.742 75.842,62.786 76.664,61.964 Q24.5@76.664,58.789 76.539,58.664 Q24.9@76.539,58.014 ; 75.86,62.962 U32.9@75.86,63.846
NetQ23_4: Q23.4 Q24.4 U32.10 | length 14.3
  Bottom Layer w0.305: U32.10@74.87,64.837 73.788,64.837 72.654,63.703 72.654,56.657 72.88,56.432 73.493,56.432 Q23.4@73.645,56.279 75.725,56.279 76.664,57.218 Q24.4@76.664,57.239 ; 77.282,58.082 77.282,58.102
NetQ23_5-6-7-8: Q23.5-6-7-8 R130.2 R132.1 U32.11 | length 13.4
  Bottom Layer w0.381: R132.1@68.681,64.916 R130.2@70.863,64.916 ; R130.2@70.869,64.913 73.092,64.913 73.516,65.337 U32.11@74.87,65.337
  Bottom Layer w1: Q23.5-6-7-8@70.333,58.115 70.333,58.681 70.891,59.24 R130.2@70.891,64.891
NetR80_2: R80.2 R81.1 U22.2 | length 9.8
  Top Layer w0.3: U22.2@152.484,32.782 152.484,31.564 154.532,29.517 R81.1@154.532,26.467
  Top Layer w0.381: R80.2@153.746,24.123 153.771,24.123 154.532,24.883 R81.1@154.532,26.467
NetR81_2: R81.2 R82.1 U22.3 | length 9.2
  Top Layer w0.3: U22.3@152.984,32.782 152.984,31.877 155.827,29.034 R82.1@157.582,29.034
  Top Layer w0.4: R82.1@157.582,29.034 157.582,26.469 R81.2@157.584,26.467
NetR82_2: R82.2 R83.1 U22.4 | length 6.9
  Top Layer w0.381: U22.4@153.975,33.773 156.93,33.773 157.582,33.122 R83.1@157.582,32.303 ; R83.1@157.205,32.303 R83.1@157.582,32.303 ; R82.2@157.582,30.503 R83.1@157.582,32.303
NetR83_2: R83.2 U22.5 | length 3.9
  Top Layer w0.4: U22.5@153.975,34.273 156.008,34.303 156.957,34.317 157.074,34.434 157.359,34.728 R83.2@157.582,34.957
NetR90_2: R90.2 R91.1 U24.2 | length 9.7
  Top Layer w0.381: U24.2@149.217,59.351 149.217,58.615 149.093,58.491 148.89,58.491 148.278,57.879 R90.2@148.278,53.492 148.278,52.611 148.924,51.964 R91.1@150.419,51.964
NetR91_2: R91.2 R92.1 U24.3 | length 4.6
  Top Layer w0.381: U24.3@149.717,59.351 149.717,59.344 149.726,59.335 149.726,57.286 R92.1@149.76,57.286 ; R92.1@149.735,57.277 149.735,56.31 150.002,56.043 150.002,55.433 R91.2@150.419,55.016
NetR92_2: R92.2 R93.1 U24.4 | length 6.3
  Top Layer w0.381: U24.4@150.708,60.341 152.058,58.99 R93.1@153.119,58.99 ; R92.2@151.204,57.277 152.654,57.277 153.213,57.836 R93.1@153.213,58.896
NetR93_2: R93.2 U24.5 | length 2.8
  Top Layer w0.381: U24.5@150.708,60.841 151.341,60.841 152.051,61.55 R93.2@153.213,61.55
NetR99_2: R99.2 R100.1 U26.2 | length 8.7
  Top Layer w0.3: R99.2@112.283,27.953 R99.2@112.295,27.965 ; U26.2@115.045,32.173 115.045,30.548 116.264,29.329 R100.1@116.264,27.965
  Top Layer w0.5: R99.2@112.295,27.965 R100.1@116.264,27.965
NetR100_2: R100.2 R101.1 U26.3 | length 5.1
  Top Layer w0.3: U26.3@115.545,32.173 115.545,30.796 116.897,29.443 117.147,29.443 117.272,29.318 R101.1@117.272,29.293
  Top Layer w0.381: R100.2@117.264,27.965 117.268,27.969 117.268,29.289 R101.1@117.272,29.293
NetR101_2: R101.2 R102.1 U26.4 | length 5
  Top Layer w0.3: U26.4@116.535,33.163 117.052,33.163 117.7,32.515 R102.1@118.491,32.515 ; R101.2@117.272,30.143 117.306,30.177 117.306,32.868
NetR102_2: R102.2 U26.5 | length 2.1
  Top Layer w0.3: U26.5@116.535,33.663 117.289,33.663 117.631,33.321 R102.2@118.491,33.321
NetR108_2: R108.2 R109.1 U28.2 | length 9.2
  Top Layer w0.508: R108.2@109.156,55.804 109.156,55.702 109.531,55.327 109.633,55.327 109.841,55.118 113.995,55.118 114.697,55.82 R109.1@114.697,57.099 114.706,57.109 114.706,57.48 114.384,57.802 U28.2@114.384,58.715
NetR109_2: R109.2 R110.1 U28.3 | length 4.1
  Top Layer w0.381: U28.3@114.884,58.715 114.884,58.395 115.697,57.582 R109.2@115.697,57.099 ; R109.2@115.662,57.135 R109.2@115.697,57.099 ; R110.1@117.551,57.563 117.551,57.538 117.112,57.099 R109.2@115.697,57.099
NetR110_2: R110.2 R111.1 U28.4 | length 2.9
  Top Layer w0.381: U28.4@115.875,59.706 116.799,59.706 116.985,59.519 117.501,59.519 R111.1@117.526,59.544 117.538,59.532 117.538,58.426 R110.2@117.551,58.413
NetR111_2: R111.2 U28.5 | length 1.7
  Top Layer w0.381: U28.5@115.875,60.206 116.67,60.206 116.815,60.35 R111.2@117.526,60.35
NetR117_2: R117.2 R118.1 U30.2 | length 7.2
  Bottom Layer w0.381: U30.2@65.55,41.631 R118.1@65.55,38.405 65.55,38.38 67.633,36.297 R117.2@68.661,36.297
NetR118_2: R118.2 R119.1 U30.3 | length 5.6
  Bottom Layer w0.381: R119.1@62.433,38.416 62.444,38.405 R118.2@64.65,38.405 64.65,41.206 U30.3@65.057,41.613
NetR119_2: R119.2 R120.1 U30.4 | length 3.8
  Bottom Layer w0.381: R119.2@62.433,40.07 R120.1@62.433,42.104 63.567,42.104 U30.4@64.046,42.583
NetR120_2: R120.2 U30.5 | length 1.6
  Bottom Layer w0.381: R120.2@62.433,43.104 U30.5@64.067,43.104
NetR126_2: R126.2 R127.1 U32.2 | length 8.1
  Bottom Layer w0.254: R126.2@73.452,72.898 74.259,72.898 76.36,70.797 R127.1@76.36,70.053 U32.2@76.36,66.827 U32.2@76.36,67.16
NetR127_2: R127.2 R128.1 U32.3 | length 5.6
  Bottom Layer w0.254: U32.3@76.86,66.827 76.86,67.16 77.26,67.559 R127.2@77.26,70.053 79.465,70.053 R128.1@79.477,70.042
NetR128_2: R128.2 R129.1 U32.4 | length 3.9
  Bottom Layer w0.381: U32.4@77.851,65.837 78.384,65.837 78.884,66.337 R129.1@79.477,66.337 R128.2@79.477,68.388
NetR129_2: R129.2 U32.5 | length 1.6
  Bottom Layer w0.381: U32.5@77.851,65.337 R129.2@79.477,65.337
NetR136_2: R136.2 U35.7 U37.2 | length 4.9
  Top Layer w0.381: U35.7@-25.994,3.684 U35.7@-26.001,3.678 -25.997,3.681 -23.625,3.681 R136.2@-23.622,3.684 -23.581,3.725 -23.581,6.155 -23.571,6.165
NetR138_2: R138.2 U38.6
NetR151_2: R151.2 R152.1 U60.2
NetR152_2: R152.2 R153.1 U60.3
NetR153_2: R153.2 R154.1 U60.4
NetR154_2: R154.2 U60.5
NetRc1_1: Rc1.1 U51.1 | length 2.5
  Top Layer w0.381: Rc1.1@79.959,9.06 79.959,11.508 U51.1@79.973,11.522
NetRc_1: Rc.1 U50.1 | length 2.3
  Top Layer w0.381: Rc.1@76.098,28.735 76.098,26.438 U50.1@76.11,26.426
NetRFB1_1: RFB1.1 RFB2.1 U50.2 | length 4.4
  Top Layer w0.381: U50.2@76.102,25.784 U50.2@76.11,25.776 76.101,25.785 73.898,25.785 RFB2.1@73.889,25.795 73.882,25.802 RFB1.1@71.788,25.802 ; RFB1.1@71.788,25.802 RFB1.1@71.78,25.809 RFB1.1@71.789,25.801
NetRFB11_1: RFB11.1 RFB21.1 U51.2 | length 4.7
  Top Layer w0.381: U51.2@79.973,12.172 79.981,12.163 82.161,12.163 RFB21.1@82.169,12.155 ; RFB21.1@82.194,12.153 82.2,12.158 84.729,12.158 RFB11.1@84.734,12.164
NetSW1_2: SW1.2 U34.1 | length 3.9
  Top Layer w0.381: SW1.2@-14.073,6.807 -14.023,6.756 -13.152,6.756 -12.929,6.533 -12.929,5.295 -12.19,4.556 U34.1@-11.795,4.556
NetSW2_2: SW2.2 U35.1 | length 4.1
  Top Layer w0.381: SW2.2@-30.302,6.401 -30.302,5.951 -29.554,5.202 -29.554,4.615 -29.266,4.328 U35.1@-28.101,4.328 U35.1@-28.497,4.328
NRST: C1.1 H1.6 J5.2 SW3.3 SW3.4 | length 4.5
  Top Layer w0.305: SW3.3@74.371,76.109 SW3.4@74.371,80.609
  other v2: 74.371,78.435
OBC_HB: H1.23
OBC_RST: H1.21
OBC_WD: R135.2 U34.7 U36.2 | length 5.1
  Top Layer w0.381: U34.7@-9.694,3.906 R135.2@-6.68,3.906 ; U36.2@-6.706,5.911 -6.696,5.901 -6.696,3.929 R135.2@-6.655,3.887 ; U36.2@-6.706,6.216 U36.2@-6.696,6.206
PC14OSC32_IN: C104.1 U1.3 Y1.2
PC14OSC32_OUT: C103.1 U1.4 Y1.1
R\X\_\E\n\a\b\l\e\: U1.57 U41.2
RS485_RX: U1.56 U41.1
RS485_TX: U1.59 U41.4
RS-485A: R85.2 U41.7
RS-485B: R85.1 U41.8
SCL: R106.2 U27.5 | length 6.8
  Top Layer w0.381: U27.5@101.774,40.011 U27.5@101.796,39.989
  Top Layer w0.5: v1(100.101,44.856) 100.1,44.855 100.074,44.855 99.691,44.471 99.691,40.568 100.269,39.989 U27.5@101.796,39.989
SDA: R107.2 U27.6 | length 11.5
  Top Layer w0.5: R107.2@99.691,47.092 99.691,46.291 98.45,45.051 98.45,40.321 99.732,39.04 101.803,39.04 ; 101.854,38.901 U27.6@101.854,39.192
  other v1: 98.763,45.348
Solar_TELEM_1: U1.8
Solar_TELEM_2: U1.9
Solar_TELEM_3: U1.10
Solar_TELEM_4: U1.11
StartupRead: U1.40
StartupWrite: U1.39
STM_HB: U1.20
STM_SCL: U1.41 U38.3
STM_SDA: U1.42 U38.8
SW2_1: C5.2 D2.1 L1.1 U2.6 | length 5.6
  Top Layer w0.381: C5.2@43.754,16.18 43.754,17.643 44.008,17.897 44.962,17.897 44.987,17.871 ; 44.987,16.403 44.987,17.871 ; L1.1@44.987,19.351 L1.1@44.987,19.34 L1.1@44.998,19.34 ; 46.253,17.907 45.023,17.907 44.987,17.871
SW2_2: C10.2 D4.1 L2.1 U3.6 | length 6.8
  Top Layer w0.508: C10.2@60.365,16.129 61.399,16.129 61.697,16.427 61.697,17.847 ; 60.461,17.847 61.697,17.847 ; L2.1@61.65,19.314 61.697,19.267 61.697,17.847 ; 62.932,17.847 61.697,17.847
SW_1: C21.2 D6.1 L3.1 U7.6
SW_2: C26.2 D8.1 L4.1 U8.6
SWCLK: U1.49
SWDIO: U1.46
TEMP_TELEM: H1.12
TEMP_TELEM_2: H1.11
TX_Enable: U1.58 U41.3
UART_RX: H1.4
UART_TX: H1.2
VBATT: C7.1 C19.1 U2.4 U2.5 U3.4 U3.5
VBatt_EnableP: D60.1 U30.1 | length 3.3
  Bottom Layer w0.254: U30.1@66.091,41.631 66.091,40.361 67.059,39.393 D60.1@67.059,38.735
VBatt_EnableS: D61.1 U32.1 | length 3.3
  Bottom Layer w0.254: D61.1@75.006,69.748 75.069,69.685 75.069,69.101 75.86,68.31 U32.1@75.86,66.827
VBatt_Primary: Q22.1 Q22.2 Q22.3 Q22.6 Q22.7 Q22.8 Q22.10
VBatt_Secondary: Q24.1 Q24.2 Q24.3 Q24.6 Q24.7 Q24.8 Q24.10
VBatt_stmDisableS: U1.23 U39.11
pads on no net: 3V3.1 3V3P.1 3V3S.1 5V.1 5VP.1 5VS.1 C2.1 C3.5V_Primary C4.1 C6.1 C11.1 C23.1 C25.1 C27.1 C28.1 C75.1 C79.1 C82.1 C85.1 C91.1 C94.1 C100. C101.1 C102.1 C121.1 D38.1 D41.1 D47.1 D50.1 D52.1 D53.1 D54.1 D55.1 H1.1 H1.3 H1.5 H1.7 H1.9 H1.10 H1.13 H1.15 H1.16 H1.17 H1.18 H1.19 H1.20 H1.22 H1.24 H1.25 H1.26 H1.27 H1.28 H1.29 H1.31 H1.32 H1.33 H1.34 H1.35 H1.36 H1.37 H1.38 H1.39 H1.40 H1.41 H1.42 H1.43 H1.44 H1.45 H1.46 H1.47 H1.48 H1.49 H1.50 H1.51 H1.52 H2.1 H2.2 H2.3 H2.4 H2.5 H2.6 H2.7 H2.8 H2.9 H2.10 H2.11 H2.12 H2.15 H2.16 H2.17 H2.18 H2.19 H2.20 H2.21 H2.22 H2.23 H2.24 H2.25 H2.26 H2.27 H2.28 H2.33 H2.34 H2.35 H2.36 H2.37 H2.38 H2.39 H2.40 H2.41 H2.42 H2.43 H2.44 H2.49 H2.50 H2.51 H2.52 J5.1 J5.5 J5.6 J5.7 J5.8 J5.9 J5.10 P1.3 R40.1 R88.1 R88.2 R89.1 R89.2 R90.1 R94.1 R95.1 R97.1 R97.2 R98.1 R98.2 R99.1 R103.1 R104.1 R106.1 R107.1 R115.2 R116.2 R117.1 R121.1 R122.1 R124.1 R124.2 R125.1 R125.2 R126.1 R130.1 R131.1 R133.1 R133.2 R134.1 R134.2 R135.1 R136.1 R137.1 R138.1 R157.1 R157.2 R158.1 R158.2 RLED1.2 RLED2.2 RLED3.2 RLED4.2 RLED5.2 RLED6.2 U1.2 U1.5 U1.6 U1.7 U1.14 U1.15 U1.22 U1.27 U1.28 U1.30 U1.33 U1.34 U1.35 U1.36 U1.37 U1.38 U1.44 U1.45 U1.50 U1.51 U1.52 U1.53 U1.54 U1.55 U1.60 U1.61 U1.62 U7.4 U7.5 U8.4 U8.5 U18.3 U18.4 U22.7 U23.4 U23.5 U23.6 U24.7 U24.12 U25.4 U25.5 U25.6 U25.7 U26.7 U26.12 U27.4 U27.7 U28.7 U29.5 U29.6 U29.7 U30.7 U30.12 U31.4 U31.5 U31.6 U31.8 U32.7 U32.12 U33.4 U33.5 U33.6 U33.7 U33.8 U34.6 U34.8 U35.6 U35.8 U36.1 U36.4 U36.5 U37.1 U37.4 U37.5 U38.2 U38.9 U38.10 U39.4 U39.6 U39.8 U39.9 U39.10 U39.12 U39.13 U39.14 U40.1 U40.3 U40.4 U40.5 U41.5 U50.3 U50.8 U51.3 U51.8 U60.7 U61.4 U61.5 U61.6 VBATT.1 VBATTP.1 VBATTS.1
copper on no net: | length 176.6
  Top Layer w0.25: 100.552,60.534 101.555,60.534 101.702,60.681 101.702,61.671 101.538,61.834 100.552,61.834
  Top Layer w0.3: 109.576,32.207 111.633,32.207 112.589,33.163 113.554,33.163
  Top Layer w0.305: 65.786,90.678 65.786,90.703
  Top Layer w0.381: 99.771,65.659 99.771,63.551 100.544,62.778 100.544,61.843 100.552,61.834 ; 99.771,69.799 99.745,69.773 99.745,68.148 98.654,67.056 98.654,61.408 98.877,61.184 100.535,61.184 100.544,61.193 ; 100.552,60.534 100.544,60.543 100.553,60.552 ; 133.727,64.821 133.727,62.211 133.779,62.158 133.919,62.158 ; 133.752,68.834 133.68,68.762 133.68,67.233 132.512,66.065 132.512,62.004 132.999,61.517 133.91,61.517 133.919,61.508 ; 135.581,35.378 135.633,35.326 136.017,35.326 ; 136.008,34.684 136.017,34.676 ; 136.22,62.158 136.375,62.158 136.428,62.211 136.428,64.821 ; 136.441,68.872 136.441,64.834 136.428,64.821 ; 136.441,68.897 136.453,68.91 ; 138.282,35.361 138.318,35.326 ; 138.328,64.807 136.442,64.807 136.428,64.821 ; 141.489,59.36 141.499,59.369 143.094,59.369 143.104,59.379 144.494,59.379 145.39,60.274 147.726,60.274
  Top Layer w0.4: 135.581,35.378 135.581,38.049 ; 135.581,42.443 135.581,41.643 134.68,40.742 v3(134.671,40.742) 134.29,40.361 134.29,35.179 134.793,34.676 136.017,34.676 ; 138.282,35.361 138.282,38.049 138.282,38.269 ; 138.282,42.443 138.282,38.269 ; 138.585,38.571 138.282,38.269
  Top Layer w0.5: 102.392,47.092 102.392,44.863 102.387,44.859 102.387,44.854 102.392,44.85 102.392,42.391 102.455,42.328 104.038,42.328 104.075,42.291 v1@104.075,40.882 ; 104.075,39.989 v1@104.075,40.869 ; 107.181,32.207 107.181,32.204 109.572,32.204 ; v1(109.576,30.886) 109.576,32.201 ; 138.585,38.571 140.335,38.571
  Top Layer w0.508: 141.202,33.36 142.256,33.36 142.977,32.639 ; 154.664,39.814 156.171,39.814 156.525,40.168 156.525,41.275
  Top Layer w0.762: 42.926,88.138 42.926,90.678 ; 45.466,88.138 45.466,90.678 ; 48.006,88.138 48.006,90.678 ; 55.626,88.138 55.626,90.678 ; 65.786,88.138 65.786,90.678 ; 68.326,88.138 68.326,90.678
  Bottom Layer w0.381: 60.089,65.497 60.073,65.497 60.02,65.444 60.02,62.27 60.243,62.047 60.517,62.047 60.829,61.735 60.829,60.935 ; 60.343,66.147 60.334,66.138 59.307,66.138 59.03,65.861 59.03,57.404 59.512,56.921 60.829,56.921 ; 62.392,65.495 62.412,65.475 63.151,65.475 ; 62.644,65.497 63.268,65.497 63.53,65.235 63.53,61.735 ; 63.53,56.921 63.53,60.935 63.53,61.588 63.842,61.9 65.659,61.9 ; 76.479,47.002 78.449,47.002 78.761,47.314 ; 78.816,47.833 78.816,43.726 79.226,43.317 79.85,43.317 ; 78.837,47.854 78.837,51.714 ; 81.538,51.714 81.605,51.781 82.737,51.781 83.447,51.071 83.447,43.019 83.104,42.676 82.416,42.676 82.406,42.666 ; 81.538,47.854 81.538,47.053 81.85,46.741 82.149,46.741 82.372,46.518 82.372,43.332 82.398,43.307
  Bottom Layer w0.508: 67.048,42.604 68.508,42.604 69.767,41.345 71.196,41.345 71.206,41.335 73.79,41.335 73.794,41.331 73.794,41.326 ; 68.674,67.488 68.674,67.482 68.678,67.478 70.856,67.478 70.866,67.469 70.871,67.464 72.135,67.464 73.614,65.985 74.757,65.985 74.887,65.854
  other v1: 104.089,40.869 102.387,44.856
  other v3: 135.581,36.173

## Polygon pours and split planes (outlines as drawn)
NetD11_2 on Top Layer "NetD11_2" (solid, remove dead copper, pour order 48): 79.972,24.765 79.972,21.59 84.112,21.59 84.112,24.765
SW2_1 on Top Layer "GND" (solid, remove dead copper, pour order 35): 43.561,19.177 43.561,20.269 46.584,20.269 46.584,16.424 48.15,16.424 48.15,13.503 43.553,13.503 43.553,19.177
5V_1 on Top Layer "Top Layer-3V3_1" (solid, remove dead copper, pour order 38): 37.008,23.063 37.008,12.751 38.583,12.751 38.583,21.082 46.99,21.082 46.99,17.272 49.809,17.272 49.809,23.063
5V_2 on Top Layer "Top Layer-3V3_1" (solid, remove dead copper, pour order 41): 53.594,23.063 53.594,12.751 55.169,12.751 55.169,21.082 63.576,21.082 63.576,17.272 66.396,17.272 66.396,23.063
NetD12_2 on Top Layer "NetD11_2" (solid, remove dead copper, pour order 47): 71.962,16.372 71.962,13.197 76.103,13.197 76.103,16.372
BOOST2_2 on Top Layer "GND" (solid, remove dead copper, pour order 44): 57.336,19.805 57.328,19.813 57.328,20.498 59.258,20.498 59.258,19.805 59.266,19.805 59.266,13.506 57.336,13.506 57.336,13.556
GND on Top Layer "Top Layer-GND" (solid, remove dead copper, pour order 43): 68.739,11.811 66.403,11.811 66.403,16.332 66.606,16.332 66.606,22.174 68.739,22.174
SW2_2 on Top Layer "GND" (solid, remove dead copper, pour order 42): 60.177,19.195 60.177,20.287 63.199,20.287 63.199,16.442 64.766,16.442 64.766,13.521 60.168,13.521 60.168,19.195
VBATT on Top Layer "GND" (solid, remove dead copper, pour order 40): 60.757,7.315 60.757,13.132 66.243,13.132 66.243,7.315
FB2_2 on Top Layer "GND" (solid, remove dead copper, pour order 39): 59.245,12.497 59.245,7.29 53.53,7.29 53.48,7.341 53.48,12.497
FB2_1 on Top Layer "GND" (solid, remove dead copper, pour order 31): 42.657,12.491 42.657,7.284 36.942,7.284 36.892,7.335 36.892,12.491
VBATT on Top Layer "GND" (solid, remove dead copper, pour order 26): 27.661,7.772 27.661,13.589 33.147,13.589 33.147,7.772
FB_2 on Top Layer "GND" (solid, remove dead copper, pour order 25): 26.177,12.943 26.177,7.736 20.462,7.736 20.411,7.787 20.411,12.943
VBATT on Top Layer "GND" (solid, remove dead copper, pour order 15): 11.024,7.595 11.024,13.411 16.51,13.411 16.51,7.595
FB_1 on Top Layer "GND" (solid, remove dead copper, pour order 14): 9.525,12.776 9.525,7.569 3.81,7.569 3.759,7.62 3.759,12.776
GND on Top Layer "Top Layer-GND" (solid, remove dead copper, pour order 36): 52.15,11.811 49.813,11.811 49.813,16.332 50.016,16.332 50.016,22.174 52.15,22.174
BOOST2_1 on Top Layer "GND" (solid, remove dead copper, pour order 33): 40.724,19.805 40.716,19.813 40.716,20.498 42.647,20.498 42.647,19.805 42.655,19.805 42.655,13.506 40.724,13.506 40.724,13.556
VBATT on Top Layer "GND" (solid, remove dead copper, pour order 32): 44.145,7.315 44.145,13.132 49.632,13.132 49.632,7.315
3V3_2 on Top Layer "Top Layer-3V3_1" (solid, remove dead copper, pour order 30): 30.378,17.729 33.249,17.729 33.249,22.758 20.396,22.758 20.396,13.157 21.971,13.157 21.971,20.777 30.378,20.777